# EAGLE board IR_linebot33 (EAGLE 5.06)
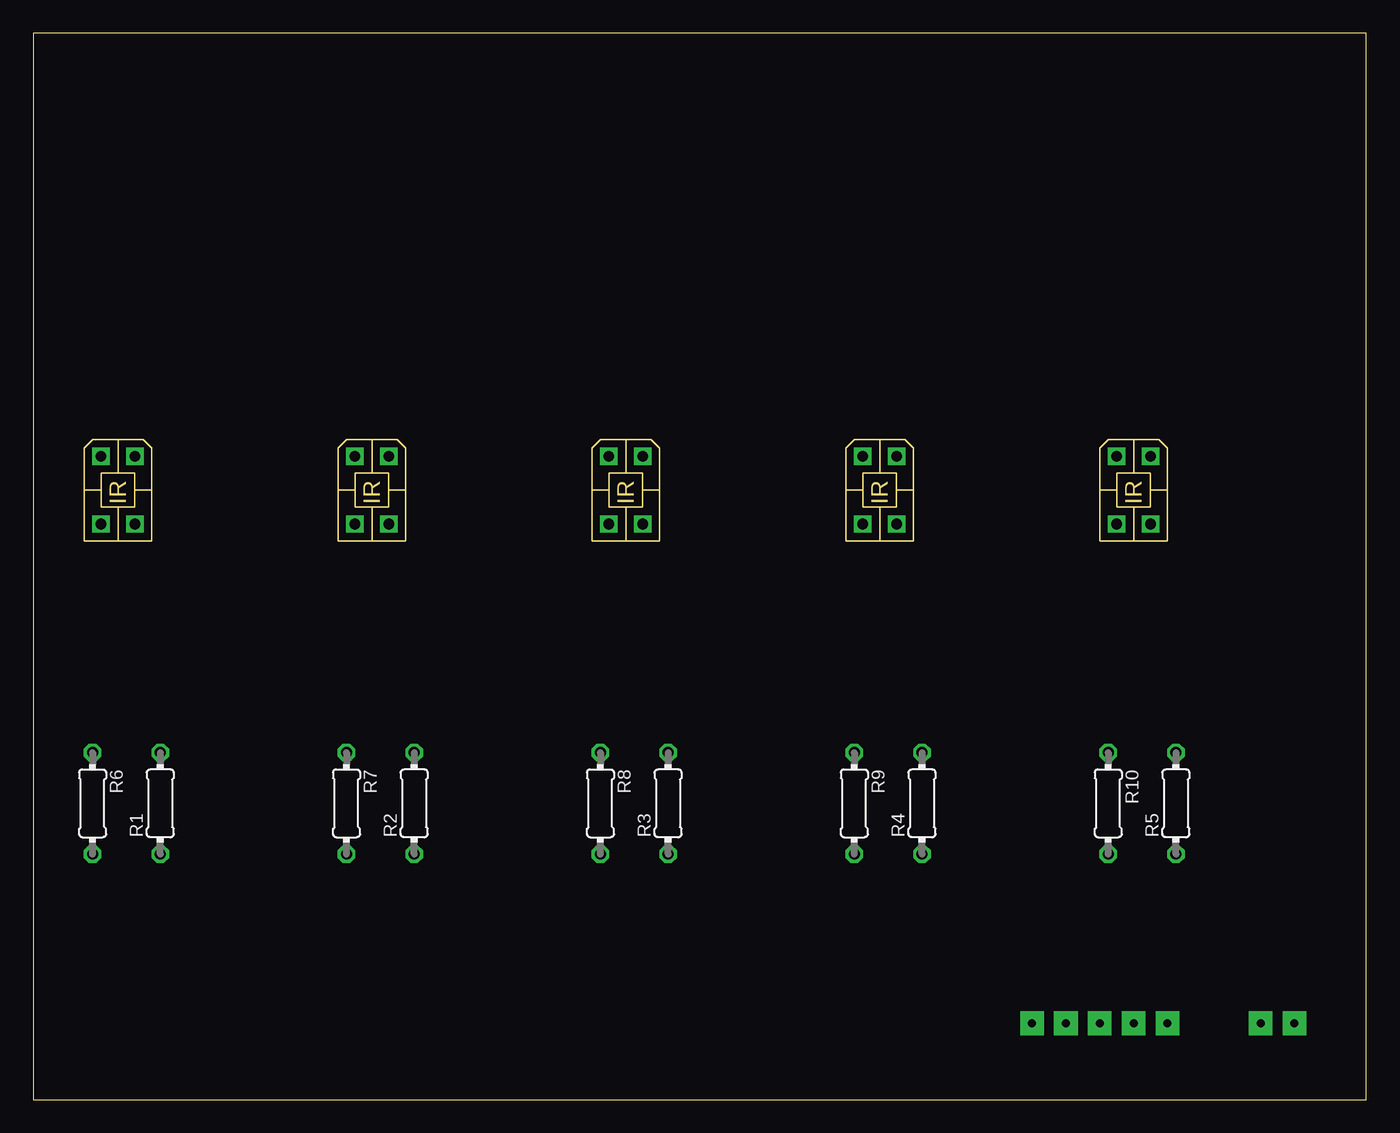
[diagram p0: board, top side]
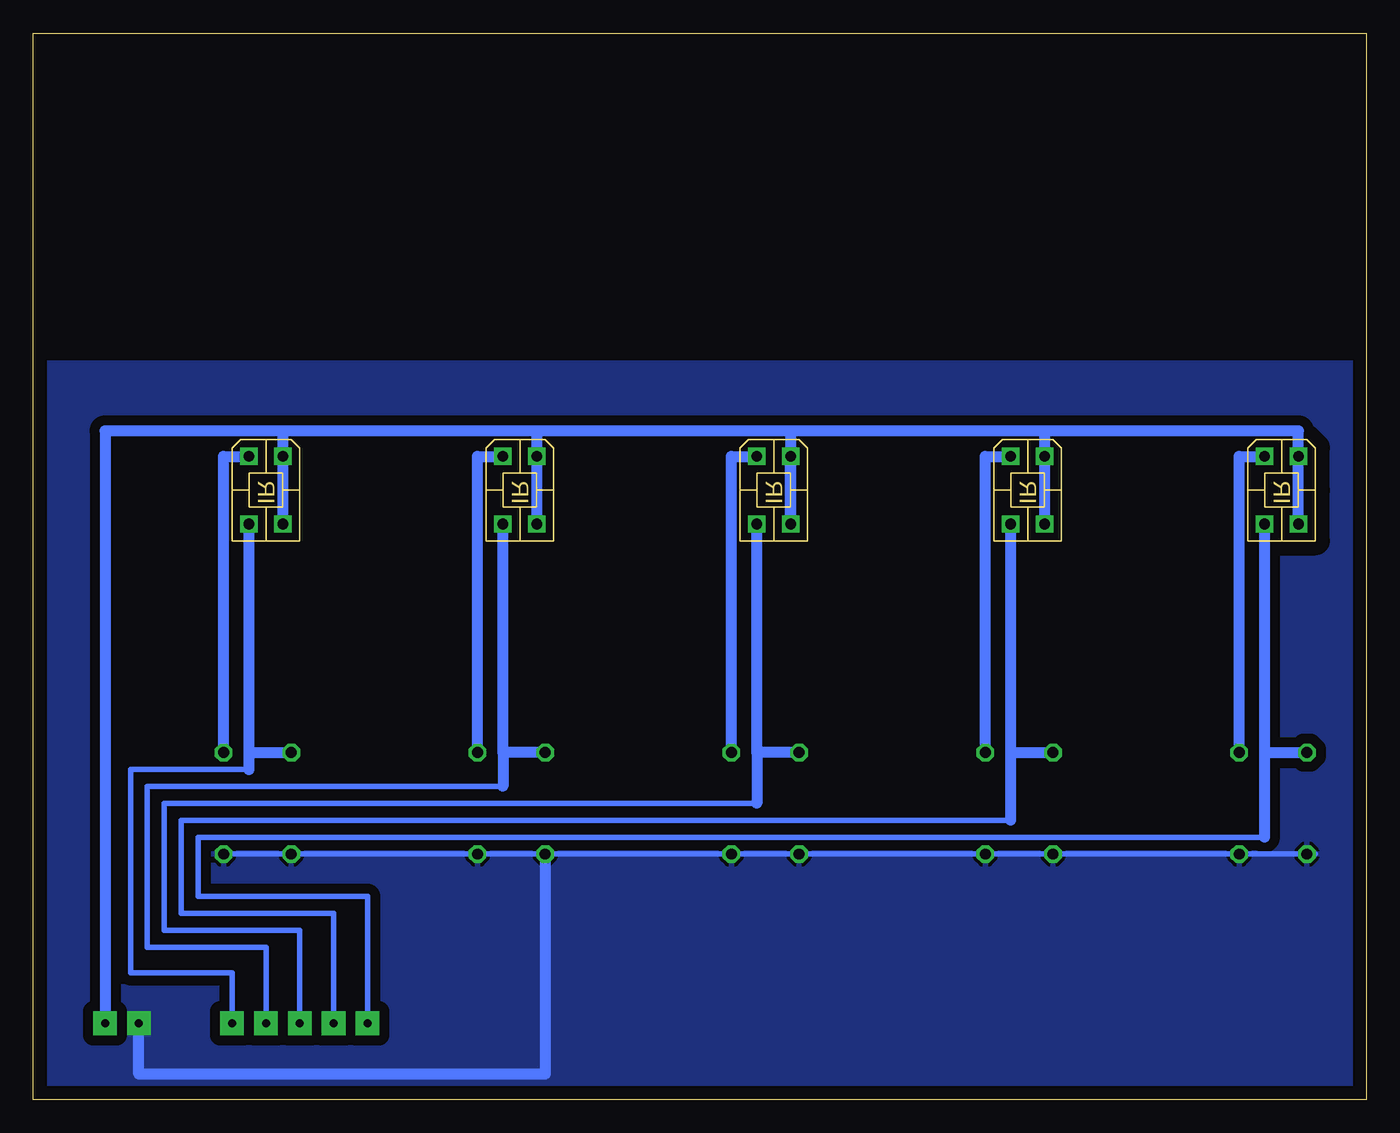
[diagram p1: board, bottom side, seen from below]

Size 100 x 80 mm. Coordinates in mm from the lower left corner, seen from the top.
Outline: 0,0 100,0 100,80 0,80 0,0
Copper layers (1*16): Top 0.035mm / dielectric 1.5mm / Bottom 0.035mm
Design rules "default *": minimum track width 10mil, minimum drill 24mil, track to track 30mil, track to pad 30mil, pad to pad 8mil, via to via 8mil, smd to smd 8mil, copper to edge 40mil, drill to drill 8mil, minimum pad ring 10mil, minimum via ring 8mil, stop-mask expansion 4mil, vias tented up to drill 0mil, thermal gap 10mil

## Footprints (pad centres in the part's own frame; a part is rotated, then mirrored left to right if it is on the bottom)
IR_1 = drill 0.8 square: 1 -2.54,1.27; 2 -2.54,-1.27; 3 2.54,1.27; 4 2.54,-1.27
0204/7 = drill 0.813 octagon: 1 -3.81,0; 2 3.81,0

## Placement (x,y rotation side)
IR1  IR_PAIR1  [IR_1]  6.35,45.72 90 top
IR2  IR_PAIR1  [IR_1]  25.4,45.72 90 top
IR3  IR_PAIR1  [IR_1]  44.45,45.72 90 top
IR4  IR_PAIR1  [IR_1]  63.5,45.72 90 top
IR5  IR_PAIR1  [IR_1]  82.55,45.72 90 top
R1  150  [0204/7]  9.53,22.23 90 top
R2  150  [0204/7]  28.57,22.23 90 top
R3  150  [0204/7]  47.62,22.23 90 top
R4  150  [0204/7]  66.67,22.23 90 top
R5  150  [0204/7]  85.72,22.23 90 top
R6  10k  [0204/7]  4.45,22.23 270 top
R7  10k  [0204/7]  23.5,22.23 270 top
R8  10k  [0204/7]  42.55,22.23 270 top
R9  10k  [0204/7]  61.59,22.23 270 top
R10  10k  [0204/7]  80.64,22.23 270 top

## Library data of the parts
IR1-IR5 = A-JD3
R1-R10 = resistor

## Nets
+5V: IR1.1 IR1.3 IR2.1 IR2.3 IR3.1 IR3.3 IR4.1 IR4.3 IR5.1 IR5.3
A0: IR1.2 R6.1
A1: IR2.2 R7.1
A2: IR3.2 R8.1
A3: IR4.2 R9.1
A4: IR5.2 R10.1
GND: R1.1 R2.1 R3.1 R4.1 R5.1 R6.2 R7.2 R8.2 R9.2 R10.2
N$1: IR1.4 R1.2
N$2: IR2.4 R2.2
N$3: IR3.4 R3.2
N$4: IR4.4 R4.2
N$5: IR5.4 R5.2

## Tracks (layer width: path | path; a pad name or v marks a point on that pad's centre or on a via)
+5V
  Bottom 0.813: 94.61,5.71 94.61,50.16 81.28,50.16 | IR5.3 IR5.1 IR5.3 | IR4.3 IR4.1 IR4.3 | 81.28,50.16 IR5.3 | 62.23,50.16 81.28,50.16 | 62.23,50.16 IR4.3 | IR2.3 IR2.1 IR2.3 | 43.18,50.16 IR3.1 IR3.3 43.18,50.16 | 43.18,50.16 62.23,50.16 | 24.13,50.16 43.18,50.16 | 24.13,50.16 IR2.3 | 24.13,50.16 5.08,50.16 IR1.3 IR1.1
A0  (via drill 0.6 pad 1.78)
  Bottom 0.406: 7.62,19.68 87.63,19.68 87.63,15.24 74.93,15.24 v74.93,5.71
  Bottom 0.813: 7.62,19.68 7.62,26.04 | 7.62,26.04 R6.1 | 7.62,26.04 IR1.2
A1  (via drill 0.6 pad 1.78)
  Bottom 0.406: 26.67,20.95 88.9,20.95 88.9,13.97 77.47,13.97 v77.47,5.71
  Bottom 0.813: 26.67,20.95 26.67,26.04 | 26.67,26.04 R7.1 | 26.67,26.04 IR2.2
A2  (via drill 0.6 pad 1.78)
  Bottom 0.406: 45.72,22.23 90.17,22.23 90.17,12.7 80.01,12.7 v80.01,5.71
  Bottom 0.813: 45.72,26.04 45.72,22.23 | R8.1 45.72,26.04 | 45.72,26.04 IR3.2
A3  (via drill 0.6 pad 1.78)
  Bottom 0.406: 64.77,23.5 91.44,23.5 91.44,11.43 82.55,11.43 v82.55,5.71
  Bottom 0.813: 64.77,26.04 64.77,23.5 | R9.1 64.77,26.04 | 64.77,26.04 IR4.2
A4  (via drill 0.6 pad 1.78)
  Bottom 0.406: 83.82,24.77 92.71,24.77 92.71,9.53 85.09,9.53 v85.09,5.71
  Bottom 0.813: 83.82,24.77 83.82,26.04 | 83.82,26.04 R10.1 | 83.82,26.04 IR5.2
GND  (via drill 0.6 pad 1.78)
  Bottom 0.406: R5.1 R10.2 R4.1 R9.2 R3.1 R8.2 R2.1 R7.2 R1.1 R6.2 3.81,18.41
  Bottom 0.813: v92.08,5.71 92.08,1.91 61.59,1.91 R9.2
  pour Bottom: 0.64,55.24 99.06,55.24 99.06,0.64 0.64,0.64
N$1
  Bottom 0.813: R1.2 9.53,48.26 IR1.4
N$2
  Bottom 0.813: R2.2 28.57,48.26 IR2.4
N$3
  Bottom 0.813: R3.2 47.62,48.26 IR3.4
N$4
  Bottom 0.813: R4.2 66.67,48.26 IR4.4
N$5
  Bottom 0.813: R5.2 85.72,48.26 IR5.4
S$1  (via drill 0.6 pad 1.78)
  other vias: 94.61,5.71